# Altium PCB disarm_it.PcbDoc
Units mil, origin at the board's own origin, x right, y up, seen from the top; angles counter-clockwise.
Board outline 1745 x 2755 mil, 2 copper layers (Top Layer, Bottom Layer); 20 components, 31 nets, 103 pads, 5 vias.
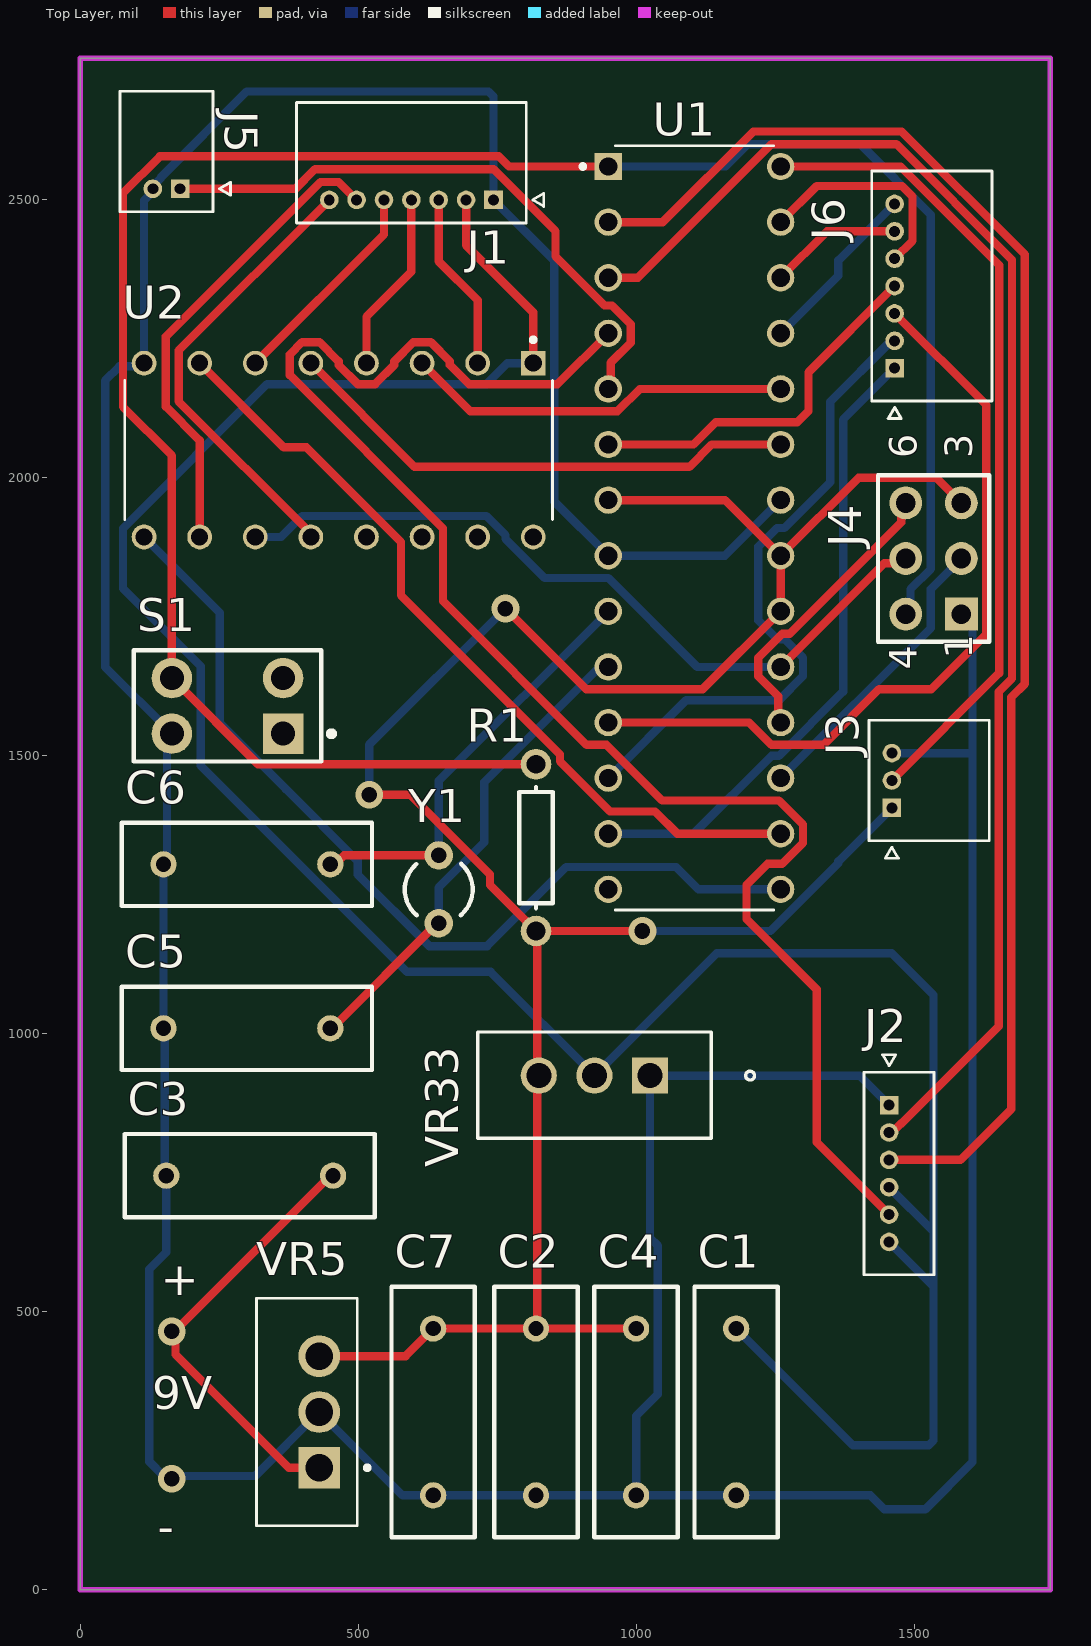
[diagram p0: Top Layer view]
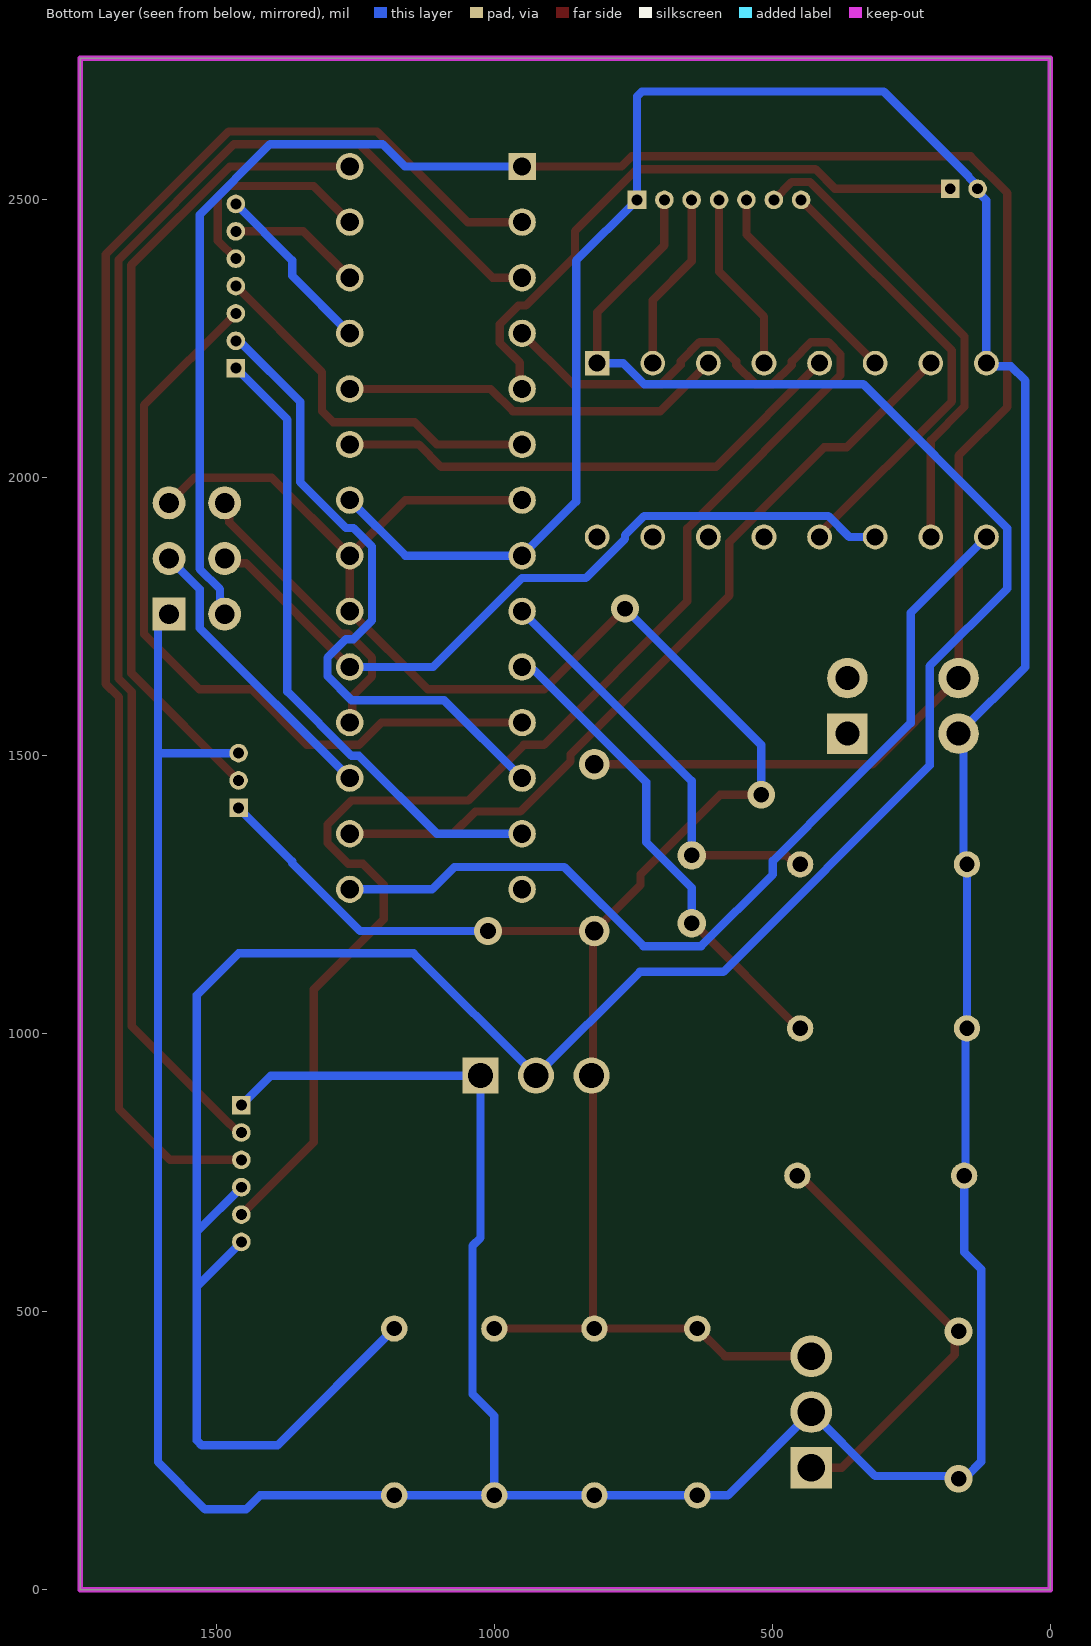
[diagram p1: Bottom Layer view, seen from below]

## Layer stack, top to bottom
Top Solder: solder mask 0.4, Solder Resist, Dk 3.5
Top Layer: signal copper 1.4
Dielectric 1: dielectric 12.6, FR-4, Dk 4.8
Bottom Layer: signal copper 1.4
Bottom Solder: solder mask 0.4, Solder Resist, Dk 3.5

## Board outline
0,0 0,2755 1745,2755 1745,0

## Design rules (kind name [scope] priority, off if disabled: settings)
BoardOutlineClearance [All] p1: gap=7.87 ignorepadtopadclearanceinfootprint=FALSE except(15.75: Arc-SplitBarrior Arc-SplitContinuation Track-SplitBarrior Track-SplitContinuation SMDPad-SplitBarrior SMDPad-SplitContinuation THPad-SplitBarrior THPad-SplitContinuation Via-SplitBarrior Via-SplitContinuation Fill-SplitBarrior Fill-SplitContinuation Poly-SplitBarrior Poly-SplitContinuation Region-SplitBarrior Region-SplitContinuation Text-SplitBarrior Text-SplitContinuation)
Clearance "Clearance Bottom Layer" [OnLayer('Bottom Layer')] p1: gap=8 ignorepadtopadclearanceinfootprint=TRUE except(10: Arc-Text Track-Text SMDPad-Text THPad-Text Via-Text Fill-Text Poly-Text Region-Text Text-Text)
Clearance "Clearance Top Layer" [OnLayer('Top Layer')] p2: gap=8 ignorepadtopadclearanceinfootprint=TRUE except(10: Arc-Text Track-Text SMDPad-Text THPad-Text Via-Text Fill-Text Poly-Text Region-Text Text-Text)
Clearance [All] p3: gap=7.87 ignorepadtopadclearanceinfootprint=FALSE except(3.5: Arc-Arc Arc-Track Arc-SMDPad Track-Track Track-SMDPad SMDPad-SMDPad; 5: Arc-Via Track-Via SMDPad-Via THPad-Via Via-Via; 10: Arc-Text Track-Text SMDPad-Text THPad-Text Via-Text Fill-Text Poly-Text Region-Text Text-Text)
HoleSize [All] p1: absolutevalues=TRUE maxlimit=248.03 minlimit=7.87 maxpercent=80.000 minpercent=20.000
MinimumAnnularRing [All] p1: minimumring=3
MinimumSolderMaskSliver [All] p1: minsoldermaskwidth=3.94
PolygonConnect PolygonConnect_1 [All] p1: thpad.connectstyle=Relief thpad.reliefconductorwidth=20 thpad.reliefentries=4 thpad.polygonreliefangle="90 Angle" thpad.airgapwidth=10 smdpad.connectstyle=Relief smdpad.reliefconductorwidth=20 smdpad.reliefentries=4 smdpad.polygonreliefangle="90 Angle" smdpad.airgapwidth=10 via.connectstyle=Direct via.reliefconductorwidth=20 via.reliefentries=4 via.polygonreliefangle="90 Angle" via.airgapwidth=10
RoutingCorners [All] p1: cornerstyle=Round minsetback=100 maxsetback=100
RoutingVias [All] p1: holewidth=19.68 width=39.37 viastyle="Through Hole" minholewidth=7.87 minwidth=17.72 maxholewidth=39.37 maxwidth=78.74
SilkToSilkClearance [All] p1: silktosilkclearance=3.94
SilkToSolderMaskClearance [IsPad] p1: minsilkscreentomaskgap=3.94 clearancetoexposedcopper=TRUE
SolderMaskExpansion [All] p1: expansion=4 istentingtop=FALSE
Width [All] p1: maxlimit=100 minlimit=3.5 preferedwidth=15
25 further rules are at their usual default settings.

## Components (designator, comment, footprint, x,y, rotation, side; value= is the part's Value field where it differs from the comment)
C1 "Cap" RAD-0.3 1180,320 r90 top value=.1uF
C2 "Cap" RAD-0.3 820,320 r270 top value=10uF
C3 "Cap" RAD-0.3 305,745 r180 top value=.33uF
C4 "Cap" RAD-0.3 1000,320 r270 top value=100pF
C5 "Cap" RAD-0.3 300,1010 r180 top value=22pF
C6 "Cap" RAD-0.3 300,1305 r180 top value=22pF
C7 "Cap" RAD-0.3 635,320 r90 top value=.1uF
J1 "530480710" MOLEX_530480710 743.43,2500 r180 top
J2 "530470610" MOLEX_530470610 1455,871.85 r90 top
J3 "530480310" MOLEX_530480310 1460,1406.57 r90 top
J4 "Header 3X2A" HDR2X3_CEN 1585,1755 r90 top
J5 "530480210" MOLEX_530480210 180,2520 r180 top
J6 "530480710" MOLEX_530480710 1465,2197.36 r90 top
R1 "Res1" AXIAL-0.3 820,1335 r90 top value=10k
S1 "SW-DPST" DPST-4 265,1590 r180 top
U1 "ATMEGA328-PU" DIP787W46P254L3467H508Q28 1105,1910 r0 top
U2 "CD4050BE" DIP794W45P254L1969H508Q16 465,2050 r270 top
VR5 "L7805CV" TO255P1040X460X1968-3 430,219.61 r90 top
VR33 "LD1117V33" TO-220_STM 1025,925 r180 top
Y1 "XTAL" R38 645,1260 r0 top

## Footprints (in the part's own frame and the unit in brackets; to place one, negate y for a bottom-side part, rotate by r counter-clockwise, add the part's x,y. Pads: shape width x height; smd on the part's side, far side on the other; paste and mask are expansions set on the pad)
AXIAL-0.3 [mm] "Axial Device, Thru-Hole; 2 Leads; 0.3 in Pin Spacing"
  round 1.4 hole 0.85: 1(-3.81,0) 2(3.81,0)
  silkscreen extent -2.77,-0.76 2.77,0.76
DIP787W46P254L3467H508Q28 [mm]
  rect 1.25x1.25 hole 0.83: 1(-3.937,16.51)
  round 1.25 hole 0.83: 2(-3.937,13.97) 3(-3.937,11.43) 4(-3.937,8.89) 5(-3.937,6.35) 6(-3.937,3.81) 7(-3.937,1.27) 8(-3.937,-1.27) 9(-3.937,-3.81) 10(-3.937,-6.35) 11(-3.937,-8.89) 12(-3.937,-11.43) 13(-3.937,-13.97) 14(-3.937,-16.51) 15(3.937,-16.51) 16(3.937,-13.97) 17(3.937,-11.43) 18(3.937,-8.89) 19(3.937,-6.35) 20(3.937,-3.81) 21(3.937,-1.27) 22(3.937,1.27) 23(3.937,3.81) 24(3.937,6.35) 25(3.937,8.89) 26(3.937,11.43) 27(3.937,13.97) 28(3.937,16.51)
  silkscreen extent -5.2,-17.45 3.62,17.45, body extent -3.95,-17.34 3.95,17.34, height 4.57
DIP794W45P254L1969H508Q16 [mm]
  rect 1.13x1.13 hole 0.78: 1(-3.97,8.89)
  round 1.13 hole 0.78: 2(-3.97,6.35) 3(-3.97,3.81) 4(-3.97,1.27) 5(-3.97,-1.27) 6(-3.97,-3.81) 7(-3.97,-6.35) 8(-3.97,-8.89) 9(3.97,-8.89) 10(3.97,-6.35) 11(3.97,-3.81) 12(3.97,-1.27) 13(3.97,1.27) 14(3.97,3.81) 15(3.97,6.35) 16(3.97,8.89)
  silkscreen extent -5.13,-9.77 3.18,9.77
DPST-4 [mm] "Switch; 4 Leads"
  rect 1.85x1.85 hole 1.1: 1(-2.54,1.27)
  round 1.85 hole 1.1: 2(-2.54,-1.27) 3(2.54,-1.27) 4(2.54,1.27)
  silkscreen extent -4.88,-2.54 4.28,2.54
HDR2X3_CEN [mm] "Connector; Header; 3x2 Position"
  rect 1.5x1.5 hole 0.9: 1(0,0)
  round 1.5 hole 0.9: 2(2.54,0) 3(5.08,0) 4(0,2.54) 5(2.54,2.54) 6(5.08,2.54)
  silkscreen extent -1.27,-1.27 6.35,3.81
MOLEX_530470610 [mm]
  rect 0.85x0.85 hole 0.5 mask+0.076: 1(0,0)
  round 0.85 hole 0.5 mask+0.076: 2(-1.25,0) 3(-2.5,0) 4(-3.75,0) 5(-5,0) 6(-6.25,0)
  silkscreen extent -7.75,-2.05 2.3,1.15, body extent -4.62,-1.6 4.62,1.6, height 0.97
MOLEX_530480210 [mm]
  rect 0.85x0.85 hole 0.5 mask+0.076: 1(0,0)
  round 0.85 hole 0.5 mask+0.076: 2(1.25,0)
  silkscreen extent -2.3,-4.45 2.75,1.05, body extent -2.12,-1.6 2.12,4.2, height 0.97
MOLEX_530480310 [mm]
  rect 0.85x0.85 hole 0.5 mask+0.076: 1(0,0)
  round 0.85 hole 0.5 mask+0.076: 2(1.25,0) 3(2.5,0)
  silkscreen extent -2.3,-4.45 4,1.05, body extent -2.75,-1.6 2.75,4.2, height 0.97
MOLEX_530480710 [mm]
  rect 0.85x0.85 hole 0.5 mask+0.076: 1(0,0)
  round 0.85 hole 0.5 mask+0.076: 2(1.25,0) 3(2.5,0) 4(3.75,0) 5(5,0) 6(6.25,0) 7(7.5,0)
  silkscreen extent -2.3,-4.45 9,1.05
R38 [mm] "Crystal, Thru-Hole; 2 Leads; Body 3.1 x 8.2 mm (Dia.xH)"
  round 1.3 hole 0.7: 1(0,1.55) 2(0,-1.55)
  silkscreen extent -1.55,-1.19 1.55,1.17
RAD-0.3 [mm] "Radial Cap, Thru-Hole; 2 Leads; 0.3 in Pin Spacing"
  round 1.2 hole 0.7: 1(-3.81,0) 2(3.81,0)
  silkscreen extent -5.71,-1.91 5.71,1.91
TO255P1040X460X1968-3 [mm]
  rect 1.91x1.91 hole 1.27: 1(0,0)
  round 1.91 hole 1.27: 2(2.55,0) 3(5.1,0)
  silkscreen extent -2.65,-2.29 7.75,2.86
TO-220_STM [mil]
  rect 65x65 hole 45: 1(0,0)
  round 65 hole 45: 2(100,0) 3(200,0)
  silkscreen extent -188,-79 310,113, body extent -105,-74 305,108, height 776

## Part data
C1 C2 C3 C4 C5 C6 C7: "Capacitor", LatestRevisionDate=17-Jul-2002, LatestRevisionNote="Re-released for DXP Platform.", PackageDescription="Radial Cap, Thru-Hole; 2 Leads; 0.3 in Pin Spacing", PackageReference=RAD-0.3, Published=8-Jun-2000, Publisher="Altium Limited"
J1 J6: Package=None, Availability=Unavailable, MP=530480710, Price=None
J2: "Connector Header Through Hole 6 position 0.049 (1.25mm)", Package=None, Availability="In Stock", Check_prices=https://www.snapeda.com/parts/530470610/Molex/view-part/4701665/?ref=eda, MF=Molex, MP=530470610, Price=None, SnapEDA_Link=https://www.snapeda.com/parts/530470610/Molex/view-part/4701665/?ref=snap
J3: "Conn Shrouded Header (4 Sides) HDR 3 POS 1.25mm Solder RA Side Entry Thru-Hole PicoBladeâ„¢ Tray", Package=None, Check_prices=https://www.snapeda.com/parts/530480310/Molex/view-part/4593638/?ref=eda, Digi-Key_Part_Number=2266-53048-0310-ND, MF=Molex, MP=530480310, Purchase-URL=https://pricing.snapeda.com/search/part/530480310/?ref=eda, SnapEDA_Link=https://www.snapeda.com/parts/530480310/Molex/view-part/4593638/?ref=snap
J4: "Header, 3-Pin, Dual row", LatestRevisionDate=17-Jul-2002, LatestRevisionNote="Re-released for DXP Platform.", Publisher="Altium Limited"
J5: "Conn Shrouded Header (4 Sides) HDR 2 POS 1.25mm Solder RA Side Entry Thru-Hole PicoBladeâ„¢ Tray", Package=None, Check_prices=https://www.snapeda.com/parts/530480210/Molex/view-part/4593640/?ref=eda, Digi-Key_Part_Number=2266-53048-0210-ND, MF=Molex, MP=530480210, Purchase-URL=https://pricing.snapeda.com/search/part/530480210/?ref=eda, SnapEDA_Link=https://www.snapeda.com/parts/530480210/Molex/view-part/4593640/?ref=snap
R1: "Resistor", LatestRevisionDate=17-Jul-2002, LatestRevisionNote="Re-released for DXP Platform.", PackageDescription="Axial Device, Thru-Hole; 2 Leads; 0.3 in Pin Spacing", PackageReference=AXIAL-0.3, Published=8-Jun-2000, Publisher="Altium Limited"
S1: "Double-Pole, Single-Throw Switch", LatestRevisionDate=17-Jul-2002, LatestRevisionNote="Re-released for DXP Platform.", PackageDescription="Switch; 4 Leads", PackageReference=DPST-4, Published=24-Mar-1999, Publisher="Altium Limited"
U1: "AVR AVRÂ® ATmega Microcontroller IC 8-Bit 20MHz 32KB (16K x 16) FLASH 28-PDIP", Package="DIP-28 Microchip Technology", Availability="In Stock", Check_prices=https://www.snapeda.com/parts/ATMEGA328-PU/Microchip/view-part/?ref=eda, MF="Microchip Technology", MP=ATMEGA328-PU, Price=None, Purchase-URL=https://pricing.snapeda.com/search/part/ATMEGA328-PU/?ref=eda, SnapEDA_Link=https://www.snapeda.com/parts/ATMEGA328-PU/Microchip/view-part/?ref=snap
U2: "CMOS Hex Non-Inverting Buffer/Converter 16-PDIP -55 to 125", Package="PDIP-16 Texas Instruments", Arrow_Electronics-Purchase-URL=https://snapeda.com/shop?store=Arrow+Electronics&id=546542, Availability=Good, DigiKey-Purchase-URL=https://snapeda.com/shop?store=DigiKey&id=546542, MF="Texas Instruments", Mouser-Purchase-URL=https://snapeda.com/shop?store=Mouser&id=546542, MP=CD4050BE, Price=None, SnapEDA_Link=https://www.snapeda.com/parts/CD4050BE/Texas%20Instruments/view-part/546542/?ref=snap, Texas_Instruments-Purchase-URL=https://snapeda.com/shop?store=Texas+Instruments&id=546542
VR5: "Linear Voltage Regulator IC 1 Output 1.5A TO-220AB", Package="TO-220 STMicroelectronics", Availability=Unavailable, MF=STMicroelectronics, MP=L7805CV, Price=None, SnapEDA_Link=https://www.snapeda.com/parts/L7805CV/STMicroelectronics/view-part/501150/?ref=snap
VR33: "No Description Available", Mfr_Name=STMicroelectronics, Copyright="Copyright (C) 2022 Ultra Librarian. All rights reserved.", Digi-Key_Part_Number_1=497-1491-5-ND, Manufacturer_Part_Number=LD1117V33, RefDes=RefDes, Type=DEV
Y1: "Crystal Oscillator", LatestRevisionDate=17-Jul-2002, LatestRevisionNote="Re-released for DXP Platform.", PackageDescription="Crystal, Thru-Hole; 2 Leads; Body 3.1 x 8.2 mm (Dia.xH)", PackageReference=R38, Published=8-Jun-2000, Publisher="Altium Limited"

## Via types
v1: diameter 50, hole 28, Top Layer to Bottom Layer, 5 vias

## Nets (pads, with @x,y where several pads share a name; then routed paths per layer and width w, separated by ;. In a path a pad name is that pad's centre, name@x,y a point inside that pad or via, vN(x,y) a via of type N, cw(c..) or ccw(c..) an arc to the next point about the centre after c; other vN are vias at no path point)
3.3V: C1.2 J1.2 J2.4 J2.6 U2.1 VR33.2 | length 4833.3
  Top Layer w15: J1.2 694.21,2418.42 815,2297.63 U2.1
  Bottom Layer w15: U2.1 768.38,2206.3 730.63,2168.56 336.48,2168.56 77.26,1909.33 77.26,1801.17 216.92,1661.5 216.92,1482.76 587.99,1111.68 738.32,1111.68 VR33.2 1145,1145 1460,1145 1535,1070 1535,644.21 ; C1.2 1390,260 1526.21,260 1535,268.79 1535,545.79 ; J2.6 1535,545.79 ; J2.4 1535,644.21 ; 1535,545.79 1535,644.21
5V: C2.1 C4.1 C7.2 J3.1 J4.3 R1.1 U1.7 U1.20 U1.21 VR5.3 VR33.3 | length 4358.8
  Top Layer w15: VR5.3 585.39,420.39 C7.2 C2.1 ; v1(520,1430) 594.13,1430 737.17,1286.96 737.17,1267.83 R1.1 ; v1(765,1765) 910.11,1619.89 1119.89,1619.89 U1.20 U1.21 ; U1.7 1160,1960 U1.21 ; C4.1 C2.1 ; v1(1011.37,1185) R1.1 ; J4.3 1539.97,2000.03 1400.03,2000.03 U1.21 ; C2.1 822.5,472.5 822.5,922.5 VR33.3 822.5,927.5 822.5,1182.5 R1.1
  Bottom Layer w15: v1(520,1430) 520,1520 v1(765,1765) ; v1(1011.37,1185) 1241.72,1185 1363.69,1306.97 1363.69,1310.26 J3.1
atm_rst: J4.4 R1.2 S1.3 U1.1 | length 3921.4
  Top Layer w15: R1.2 320,1485 S1.3 165,2039.98 77.26,2127.72 77.26,2512.05 143.44,2578.23 753.1,2578.23 771.34,2560 U1.1
  Bottom Layer w15: U1.1 1160.95,2560 1201.05,2600.11 1403.11,2600.11 1530.03,2473.19 1530.03,1836.35 1493.43,1799.75 1493.43,1763.43 J4.4
GND: C1.1 C2.2 C3.2 C4.2 C5.2 C6.2 C7.1 J1.1 J2.1 J3.3 J4.1 J5.2 S1.4 U1.8 U1.22 U2.8 VR5.2 VR33.1 | length 8929.7
  Bottom Layer w15: U1.22 1160,1860 U1.8 852.74,1957.26 852.74,2390.68 J1.1 743.43,2686.21 734.64,2695 299.62,2695 146.24,2541.63 146.24,2540.45 130.79,2525 J5.2 130.79,2515 115,2499.22 U2.8 109.36,2200.66 70.66,2200.66 45,2175 45,1660 S1.4 156.17,1531.17 156.17,1311.17 C6.2 C5.2 152.5,1007.5 152.5,747.5 C3.2 155,607.5 124.5,577 124.5,230.5 150,205 315,205 VR5.2 580,170 C7.1 C2.2 C4.2 ; J2.1 1401.85,925 VR33.1 1025,633.07 1039.12,618.95 1039.12,352.03 1000,312.9 C4.2 ; J3.3 1600,1505 1605,1510 ; J4.1 1605,1735 1605,1510 ; C4.2 C1.1 1421.48,170 1446.48,145 1520,145 1605,230 1605,1510
  other v1: 165,200
keypad_c1: J6.5 U1.27 | length 397.1
  Top Layer w15: U1.27 1324.87,2524.87 1478.35,2524.87 1497.23,2505.99 1497.23,2426.44 J6.5
keypad_c2: J6.7 U1.25 | length 317.6
  Bottom Layer w15: U1.25 1363.66,2363.66 1363.66,2391.3 J6.7
keypad_c3: J6.3 U1.11 | length 1424.2
  Top Layer w15: U1.11 1203.28,1560 1243.39,1519.89 1337.13,1519.89 1437.13,1619.89 1530.87,1619.89 1630.03,1719.05 1630.03,2130.76 J6.3
keypad_r1: J6.6 U1.26 | length 239.6
  Top Layer w15: U1.26 1343.43,2443.43 J6.6
keypad_r2: J6.1 U1.13 | length 1148.3
  Bottom Layer w15: U1.13 1103.28,1360 1243.39,1500.11 1256.83,1500.11 1372.34,1615.62 1372.34,2104.7 J6.1
keypad_r3: J6.2 U1.12 | length 1183.4
  Bottom Layer w15: U1.12 1090.11,1600.11 1256.83,1600.11 1300.11,1643.39 1300.11,1676.61 1266.72,1710 1253.28,1710 1219.89,1743.39 1219.89,1876.61 1253.28,1910 1266.72,1910 1349.34,1992.62 1349.34,2137.08 1455.29,2243.04 1461.47,2243.04 J6.2
keypad_r4: J6.4 U1.6 | length 674.1
  Top Layer w15: U1.6 1103.28,2060 1143.39,2100.11 1290.11,2100.11 1310,2120 1310,2190 J6.4
miso_pb4: J4.6 U1.18 | length 529.3
  Top Layer w15: U1.18 1255.78,1564.22 1255.78,1607.11 1219.89,1642.99 1219.89,1676.61 1263.17,1719.89 1276.61,1719.89 1476.57,1919.85 1476.57,1946.57 J4.6
mosi_pb3: J4.2 U1.17 | length 529.6
  Bottom Layer w15: U1.17 1530.03,1730.03 1530.03,1800.03 J4.2
NetC3_1: C3.1 VR5.1 | length 793.1
  Top Layer w15: VR5.1 375.39,219.61 171.7,423.3 171.7,458.3 v1(165,465) 170,465 450,745 C3.1
NetC5_1: C5.1 U1.10 Y1.2 | length 872.2
  Top Layer w15: C5.1 453.01,1010 641.99,1198.98 Y1.2 Y1.2@645,1201.22
  Bottom Layer w15: Y1.2 645,1262.91 727.04,1344.96 727.04,1452.94 927.56,1653.45 943.45,1653.45 U1.10
NetC6_1: C6.1 U1.9 Y1.1 | length 766.9
  Top Layer w15: C6.1 458.73,1305 474.75,1321.02 Y1.1
  Bottom Layer w15: Y1.1 645,1455 U1.9
NetJ1_3: J1.3 U2.2 | length 322.7
  Top Layer w15: J1.3 645,2389.64 715,2319.64 U2.2
NetJ1_4: J1.4 U2.4 | length 327.2
  Top Layer w15: U2.4 515,2290 595.79,2370.79 J1.4
NetJ1_5: J1.5 U2.6 | length 389.6
  Top Layer w15: U2.6 546.57,2437.87 J1.5
NetJ1_6: J1.6 U2.10 | length 857.3
  Top Layer w15: U2.10 215,2067.47 154.26,2128.22 154.26,2254.26 432.23,2532.23 465.13,2532.23 J1.6
NetJ1_7: J1.7 U2.12 | length 817
  Top Layer w15: U2.12 415,1900 177.26,2137.74 177.26,2229.11 J1.7
oled_cs: U1.15 U2.9 | length 1655.9
  Bottom Layer w15: U2.9 251.3,1757.4 251.3,1558.94 370.17,1440.07 370.25,1440.07 499.12,1311.21 499.12,1286.75 627.98,1157.89 731.99,1157.89 874.21,1300.11 1072.01,1300.11 1112.12,1260 U1.15
oled_dc: U1.24 U2.3 | length 697.4
  Top Layer w15: U2.3 701.41,2119.89 966.61,2119.89 1006.72,2160 U1.24
oled_din: U1.16 U2.7 | length 1459.3
  Top Layer w15: U2.7 366.3,2055 407.08,2055 577.26,1884.82 577.26,1788.64 863.06,1502.84 863.06,1490.22 953.17,1400.11 1034.09,1400.11 1074.19,1360 U1.16
oled_sclk: U1.23 U2.5 | length 938.8
  Top Layer w15: U2.5 601.41,2019.89 1095.7,2019.89 1135.81,2060 U1.23
pc5_adc5: J3.2 U1.28 | length 1473.3
  Top Layer w15: U1.28 1475.75,2560 1653.03,2382.72 1653.03,1648.82 J3.2
pd0_rx: J2.3 U1.2 | length 2712.9
  Top Layer w15: U1.2 1047.88,2460 1210.99,2623.11 1477.7,2623.11 1699.03,2401.77 1699.03,1629.76 1675,1605.73 1675,865 1583.43,773.43 J2.3
pd1_tx: J2.2 U1.3 | length 2582.3
  Top Layer w15: U1.3@945.78,2364.22 U1.3 1003.28,2360 1243.39,2600.11 1468.17,2600.11 1676.03,2392.25 1676.03,1639.29 1652,1615.26 1652,1013.47 1476.63,838.09 1475.45,838.09 1460,822.64 J2.2
pd2_irq: J2.5 U1.4 | length 2962.2
  Top Layer w15: U1.4 858.56,2168.56 699.37,2168.56 665,2202.92 665,2209.68 630.63,2244.04 599.37,2244.04 565,2209.68 565,2202.92 530.63,2168.56 499.37,2168.56 465,2202.92 465,2209.68 430.63,2244.04 399.37,2244.04 377.26,2221.93 377.26,2184.82 652.74,1909.33 652.74,1778.2 911.05,1519.89 946.83,1519.89 1046.83,1419.89 1256.83,1419.89 1300.11,1376.61 1300.11,1343.39 1262.46,1305.74 1236.28,1305.74 1198.63,1268.09 1198.63,1206.37 1324.71,1080.29 1324.71,805.29 J2.5
pd3_pwm: J5.1 U1.5 | length 1100
  Top Layer w15: J5.1 387.47,2520 422.71,2555.23 743.58,2555.23 854.93,2443.88 854.93,2398.35 943.28,2310 956.72,2310 990.11,2276.61 990.11,2242.99 954.22,2207.11 954.22,2164.22 U1.5
sck_pb5: J4.5 U1.19 U2.11 | length 1382.8
  Top Layer w15: U1.19 1446.57,1846.57 1476.57,1846.57 J4.5
  Bottom Layer w15: U2.11 361.62,1893.7 399.37,1931.44 730.63,1931.44 765,1897.08 765,1890.32 835.43,1819.89 950.11,1819.89 1110,1660 U1.19
pads on no net: S1.1 S1.2 U1.14 U2.13 U2.14 U2.15 U2.16

## Keep-outs
Keep-Out Layer:
  the board outline again, w10

## Silkscreen, mask and mechanical layers (free items; w line width, h text height)
Top Overlay:
  text "+" at 145,530 h60
  text "9V" at 130,325 h60
  text "-" at 140,85.01 h60

## Text inside footprints (layer, text, board x,y; h text height)
J4: Top Overlay "6" at 1505,2035 h50 r90; Top Overlay "3" at 1605,2035 h50 r90; Top Overlay "1" at 1605,1675 h50 r90; Top Overlay "4" at 1505,1655 h50 r90